# Altium PCB 175-00035 rev1, Flex Pwr Sply.PcbDoc
Units mm, origin at the board's own origin, x right, y up, seen from the top; angles counter-clockwise.
Board outline 160 x 100 mm, 5 copper layers (Top Layer (*GTL), Internal Plane 1 (*GP1), Internal Plane 2 (*GP2), Internal Plane 3 (*.GP3), Bottom Layer (*GBL)); 76 components, 28 nets, 320 pads, 50 vias.
Unrouted connection lines stored in the file: 3.
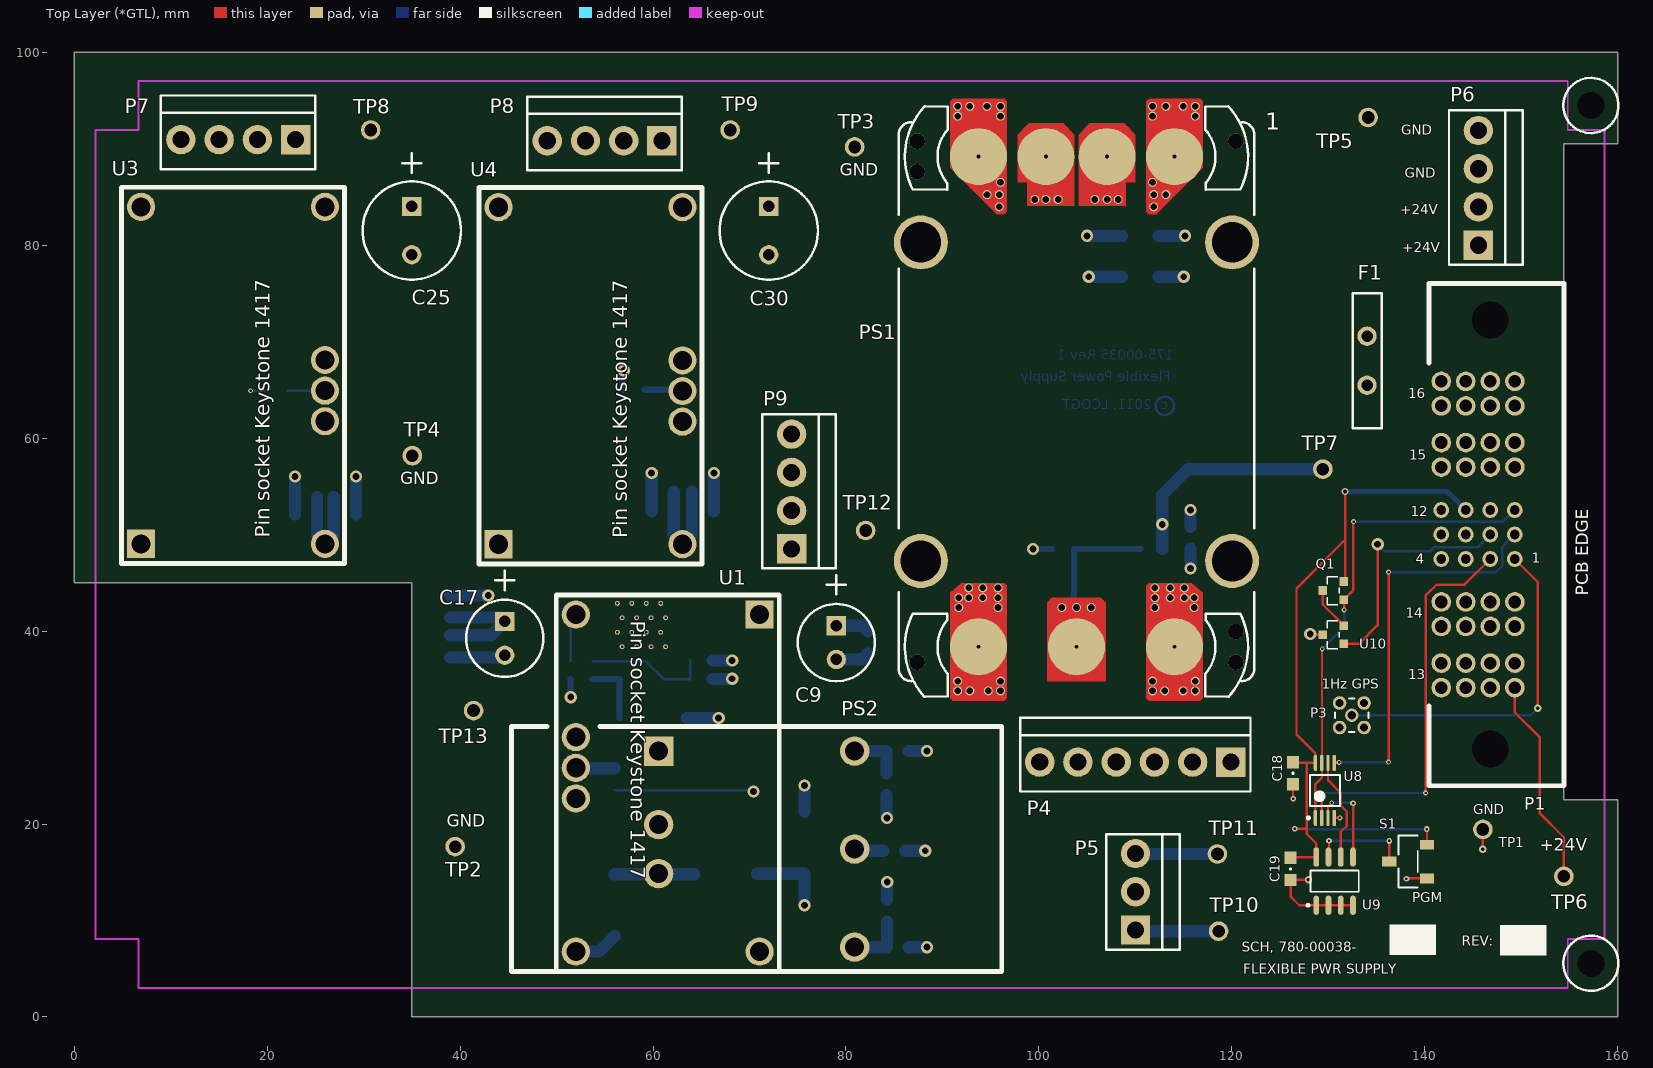
[diagram p0: Top Layer (*GTL) view]
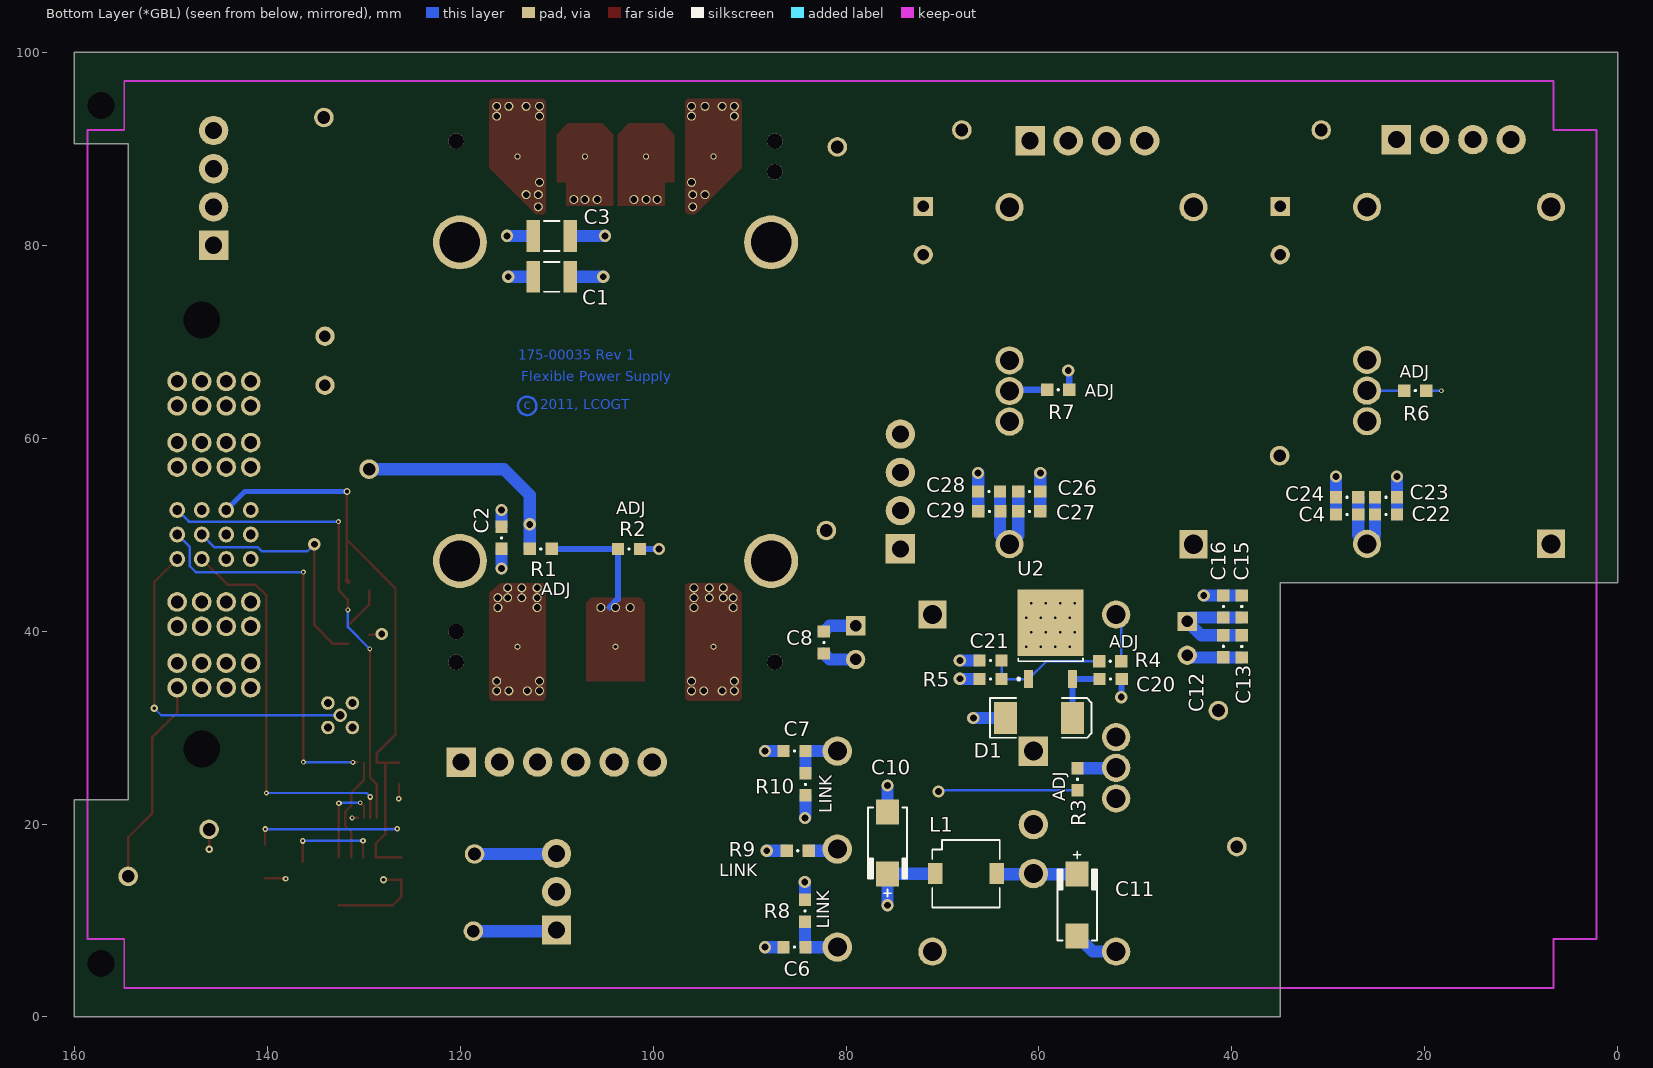
[diagram p1: Bottom Layer (*GBL) view, seen from below]
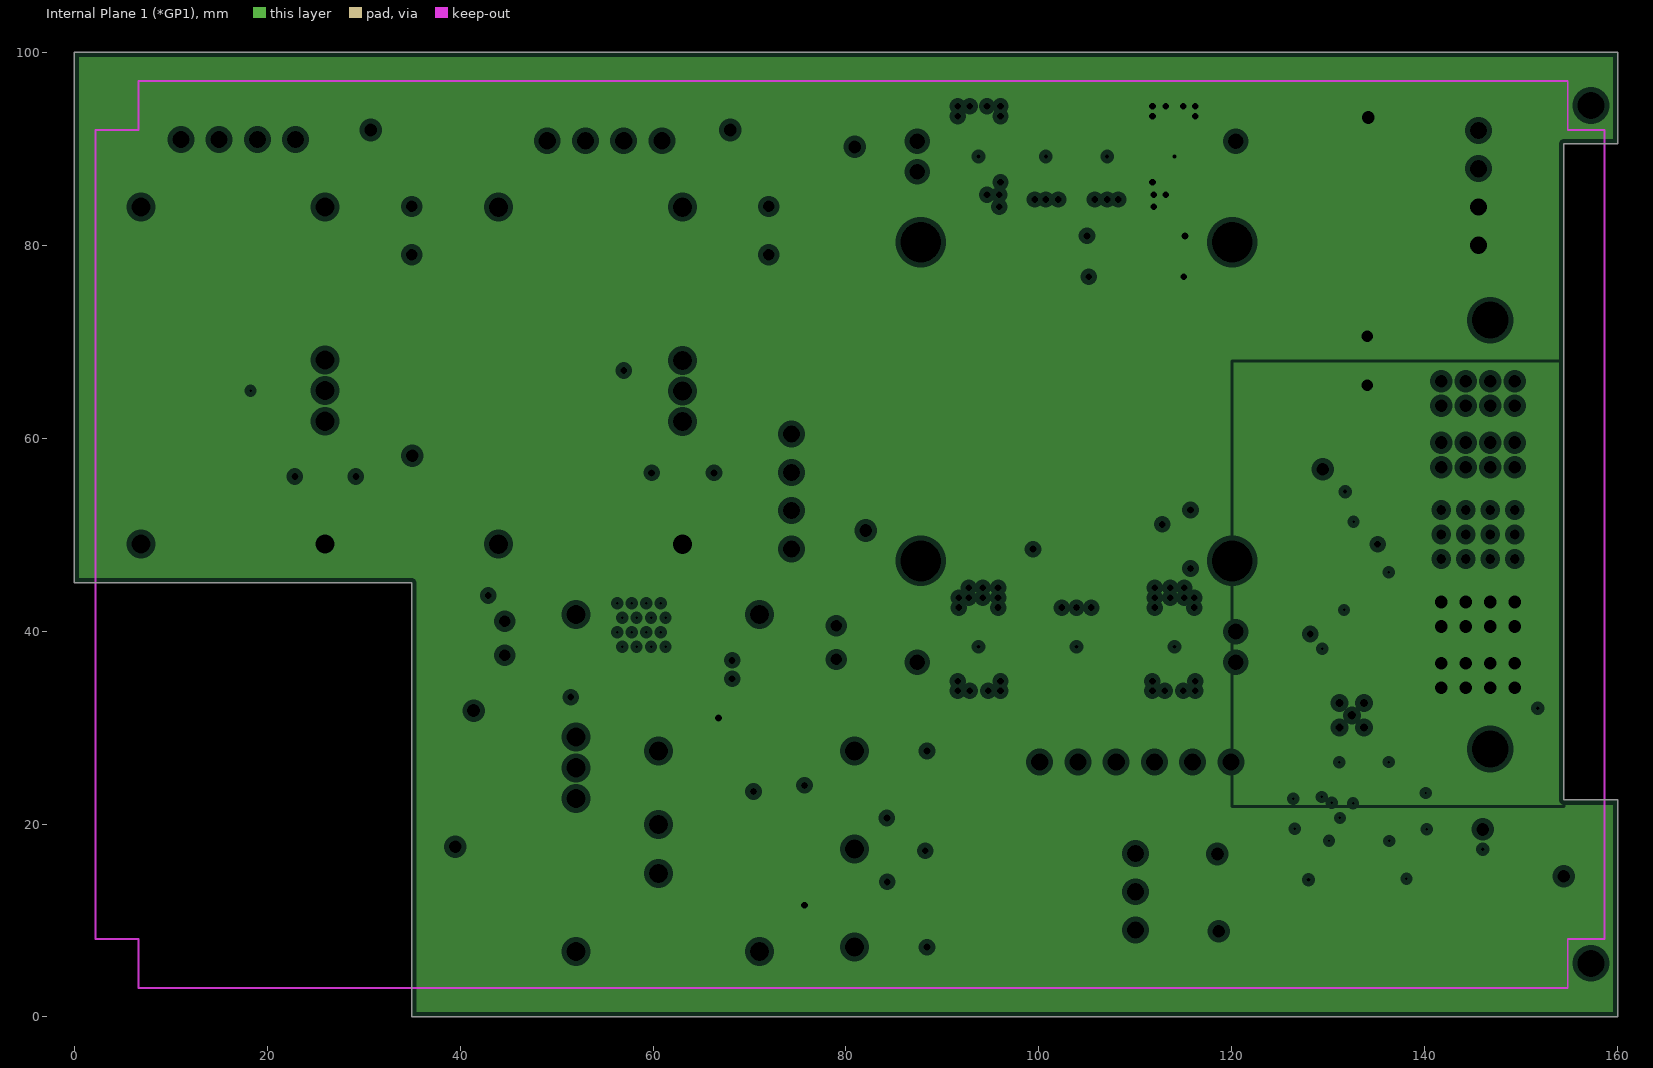
[diagram p2: Internal Plane 1 (*GP1), clearances drawn from the general rule]
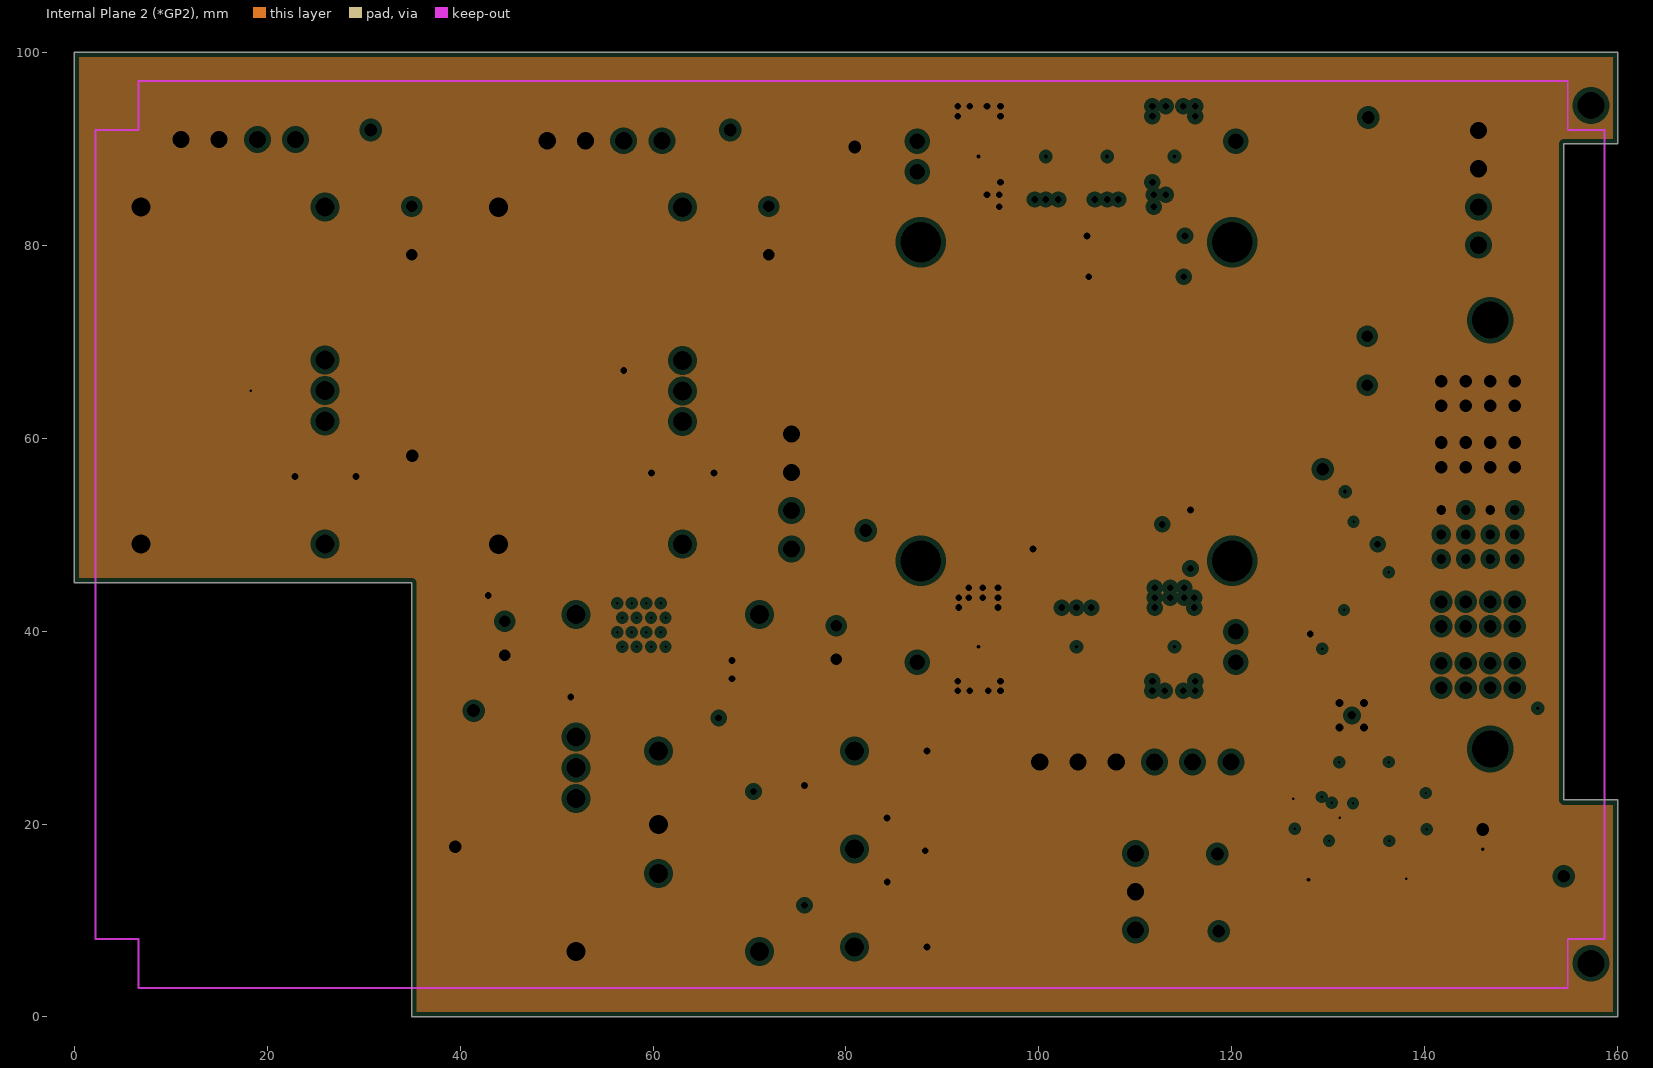
[diagram p3: Internal Plane 2 (*GP2), clearances drawn from the general rule]
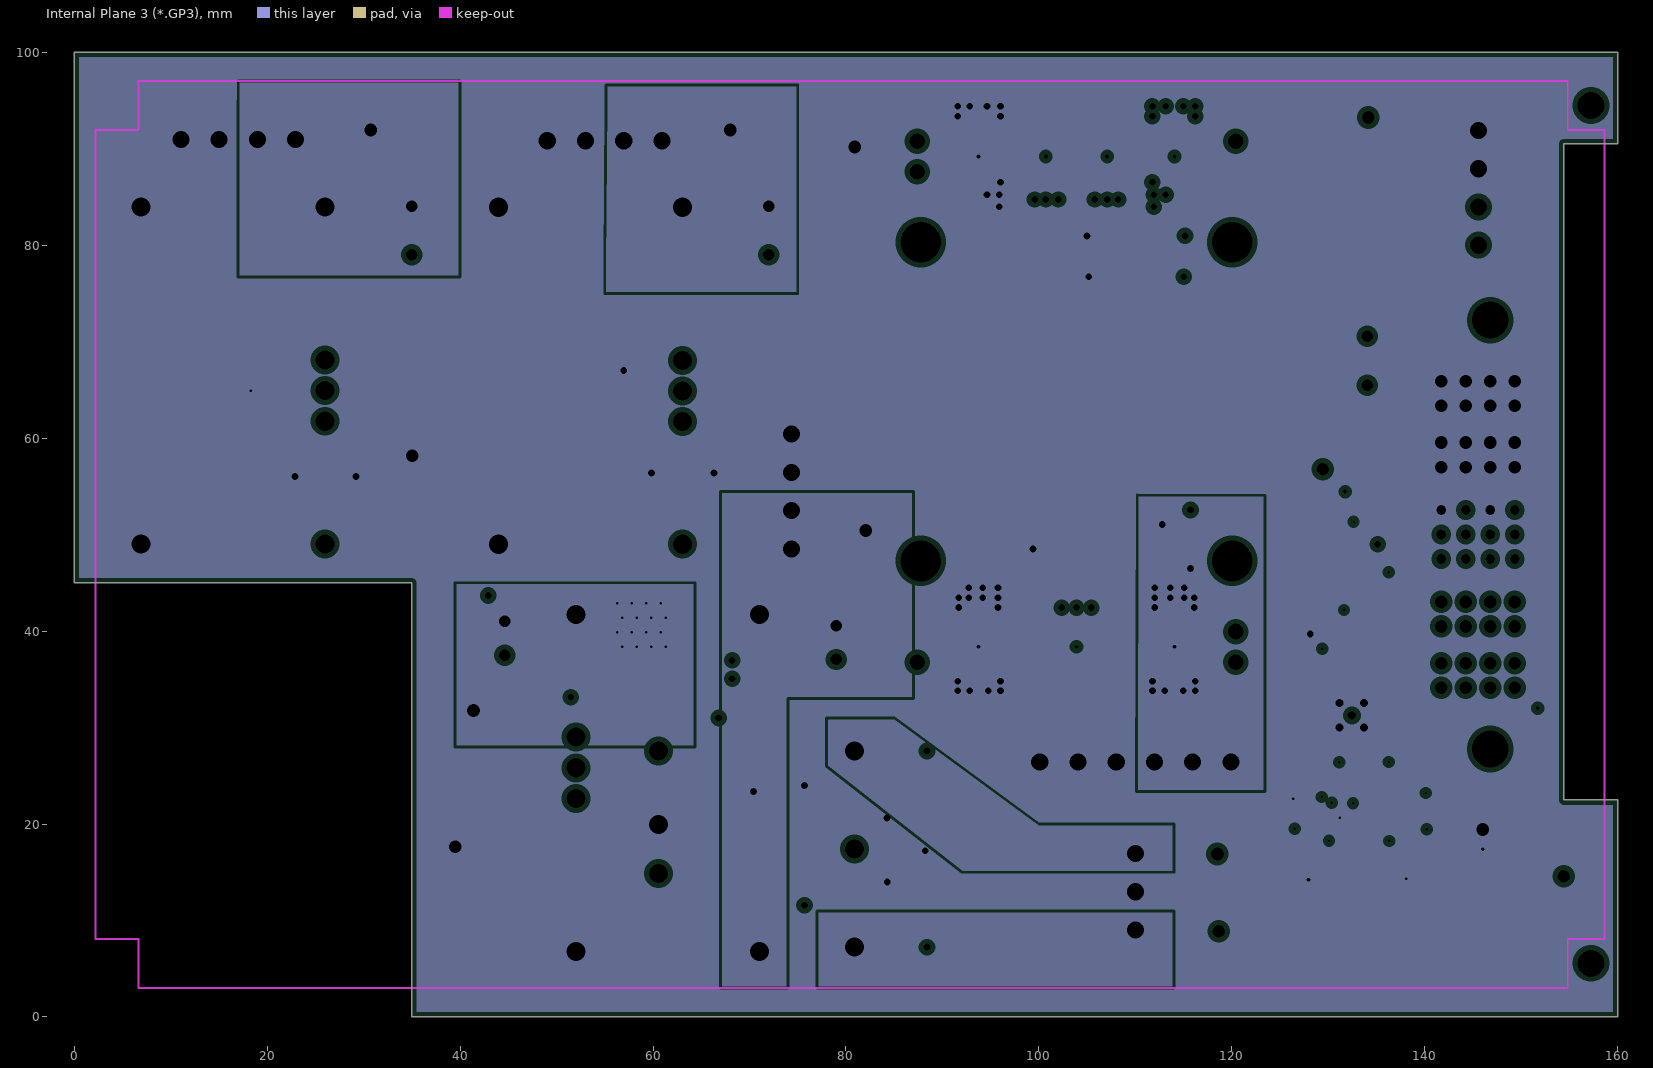
[diagram p4: Internal Plane 3 (*.GP3), clearances drawn from the general rule]

## Layer stack, top to bottom
Top Layer (*GTL): signal copper 0.0356
Dielectric: core 0.32, FR-4, Dk 4.8
Internal Plane 1 (*GP1): plane copper 0.0356, net (Multiple Nets)
Dielectric: prepreg 0.32, FR-4, Dk 4.8
Internal Plane 2 (*GP2): plane copper 0.0356, net GND
Dielectric: core 0.32, FR-4, Dk 4.8
Internal Plane 3 (*.GP3): plane copper 0.0356, net (Multiple Nets)
Dielectric: prepreg 0.32, FR-4, Dk 4.8
Bottom Layer (*GBL): signal copper 0.0356

## Board outline
35,0 35,45 0,45 0,100 160,100 160,90.5 154.4,90.5 154.4,22.5 160,22.5 160,0

## Design rules (kind name [scope] priority, off if disabled: settings)
Clearance [All] p1: gap=0.229
ComponentClearance ComponentClearance_1 [InComponent('PS2') vs InComponent('U1')] p1: gap=-100 collisioncheckmode=3 verticalgap=-100 showdistances=FALSE
ComponentClearance [All] p2: gap=0.254 collisioncheckmode=3 verticalgap=0.254 showdistances=FALSE
HoleSize [All] p1: absolutevalues=TRUE maxlimit=5.08 minlimit=0.025 maxpercent=80.000 minpercent=20.000
HoleToHoleClearance [All] p1: gap=0.127 allowstackedmicrovias=TRUE
MinimumSolderMaskSliver [All] p1: minsoldermaskwidth=0.025
PlaneClearance [All] p1: clearance=0.508
PlaneConnect PlaneConnect_1 [InComponent('PS1')] p1: planeconnectstyle=Direct reliefexpansion=0.508 reliefentries=4 reliefconductorwidth=0.254 reliefairgap=0.254
PlaneConnect [All] p2: planeconnectstyle=Relief reliefexpansion=0.508 reliefentries=4 reliefconductorwidth=0.254 reliefairgap=0.254
PolygonConnect [All] p1: connectstyle=Relief reliefconductorwidth=0.254 reliefentries=4 polygonreliefangle="90 Angle"
RoomDefinition "780-00038 rev1, Pg1, SCH, Flex Pwr Sply" [InComponentClass('780-00038 rev1, Pg1, SCH, Flex Pwr Sply')] p1: confinementstyle=ConfineIn formatcopy=TRUE lockcomponents=FALSE outline -35,-38.49 191.795,-38.49 191.795,128.295 -35,128.295
RoutingVias [All] p1: holewidth=0.711 width=1.27 viastyle="Through Hole" minholewidth=0.254 minwidth=0.508 maxholewidth=0.711 maxwidth=1.27
SilkToSilkClearance [All] p1: silktosilkclearance=0.051
SilkscreenOverComponentPads [All] p1: minsilkscreentomaskgap=0.051
SolderMaskExpansion [All] p1: expansion=0.102
Width [All] p1: maxlimit=1.27 minlimit=0.254 preferedwidth=0.635
20 further rules are at their usual default settings.

## Components (designator, comment, footprint, x,y, rotation, side; value= is the part's Value field where it differs from the comment)
C1 "Y-RATED" 1812 110.498,76.708 r0 bottom
C2 "100V" SMD_0805 115.697,49.657 r90 bottom
C3 "0.22uF" 1812 110.498,80.929 r0 bottom
C4 "35V CER" SMD_0805 28.067,52.07 r180 bottom
C6 "Cap SMD" SMD_0805 85.344,7.239 r180 bottom
C7 "Cap SMD" SMD_0805 85.344,27.559 r0 bottom
C8 "35V CER" SMD_0805 82.296,38.803 r90 bottom
C9 "35V" "CAP, Thru Hole 8mm dia" 79,38.803 r90 top
C10 "35V" SMD_CAP_7343 75.692,18.034 r270 bottom
C11 "35V" SMD_CAP_7343 56.043,11.595 r90 bottom
C12 "35V CER" SMD_0805 40.894,38.418 r90 bottom
C13 "35V CER" SMD_0805 38.989,38.407 r90 bottom
C15 "35V CER" SMD_0805 38.989,42.545 r270 bottom
C16 "35V CER" SMD_0805 40.894,42.545 r270 bottom
C17 "35V" "CAP, Thru Hole 8mm dia" 44.635,39.243 r90 top
C18 "Cap SMD" SMD_0805 126.323,25.253 r270 top
C19 "Cap SMD" SMD_0805 126.069,15.347 r270 top
C20 "Cap SMD" SMD_0805 52.578,35.02 r0 bottom
C21 "Cap SMD" SMD_0805 65.024,36.957 r180 bottom
C22 "35V CER" SMD_0805 24.029,52.07 r0 bottom
C23 "35V CER" SMD_0805 24.029,53.861 r0 bottom
C24 "35V CER" SMD_0805 28.067,53.861 r180 bottom
C25 "35V" "CAP, Thru Hole 10mm dia" 35,81.5 r90 top
C26 "35V CER" SMD_0805 61,54.458 r0 bottom
C27 "35V CER" SMD_0805 61,52.4 r0 bottom
C28 "35V CER" SMD_0805 65.179,54.458 r180 bottom
C29 "35V CER" SMD_0805 65.143,52.4 r180 bottom
C30 "35V" "CAP, Thru Hole 10mm dia" 72,81.5 r90 top
D1 "S5BC-13-F" SMC 59.984,30.988 r180 bottom
F1 "RUEF400" "PolySwitch Radial 0.2" 134,68.015 r90 top
L1 "445-3869-1-ND" "Inductor TDC SLF" 67.564,14.859 r90 bottom
P1 "PETC-02-12-02--01-S-RA-SD" PETC-02-12-02-01-RA 145.5,50 r0 top locked
P3 "COAX MMCX" MMCX2.54-V5 132.42,31.27 r90 top
P4 "Header 6 0.156\"" "HDR 1X6 0.156\"" 119.887,26.416 r180 top
P5 "Header 3" "HDR 1X3 0.156\"" 110,9.015 r90 top
P6 "Header 4 0.156\"" "HDR 1X4 0.156\"" 145.542,79.985 r90 top
P7 "Header 4 0.156\"" "HDR 1X4 0.156\"" 22.962,90.924 r180 top
P8 "Header 4 0.156\"" "HDR 1X4 0.156\"" 60.925,90.807 r180 top
P9 "Header 4 0.156\"" "HDR 1X4 0.156\"" 74.364,48.514 r90 top
PS1 "Vicor Micro" "VICOR MICRO SURFMATE" 120.396,36.768 r0 top locked
PS2 "BetaDyne LMB15" "BetaDyne LNB15, DC/DC" 96.139,30.099 r180 top
Q1 "FDV304P" SMD_SOT23_3 130.5,44.185 r90 top
R1 "Res 0805" SMD_0805 111.633,48.514 r0 bottom
R2 "Res 0805" SMD_0805 102.489,48.489 r180 bottom
R3 "Res 0805" SMD_0805 56.007,24.638 r270 bottom
R4 "Res 0805" SMD_0805 52.614,36.87 r180 bottom
R5 "Res 0805" SMD_0805 65.024,35.02 r180 bottom
R6 "Res 0805" SMD_0805 21,64.912 r0 bottom
R7 "Res 0805" SMD_0805 58,65 r0 bottom
R8 "Res 0805" SMD_0805 84.237,11 r90 bottom
R9 "Res 0805" SMD_0805 85,17.23 r0 bottom
R10 "Res 0805" SMD_0805 84.201,24.11 r90 bottom
S1 "CJS-1200TB" CAS-120B 138.261,16.109 r90 top
TP1 "Test point" PAD_80D_052H 146,19.443 r180 top
TP2 "Test point" PAD_80D_052H 39.497,17.653 r90 top
TP3 "Test point" PAD_80D_052H 80.899,90.17 r90 top
TP4 "Test point" PAD_80D_052H 35.052,58.166 r90 top
TP5 "Test point" PAD_80D_052H 134.112,93.218 r90 top
TP6 "Test point" PAD_80D_052H 154.39,14.58 r90 top
TP7 "Test point" PAD_80D_052H 129.413,56.769 r90 top
TP8 "Test point" PAD_80D_052H 30.746,91.923 r90 top
TP9 "Test point" PAD_80D_052H 68,91.923 r90 top
TP10 "Test point" PAD_80D_052H 118.618,8.89 r90 top
TP11 "Test point" PAD_80D_052H 118.491,16.891 r90 top
TP12 "Test point" PAD_80D_052H 82.042,50.419 r90 top
TP13 "Test point" PAD_80D_052H 41.402,31.75 r90 top
U1 "4A Neg Adj Switching Regulator" "TEXAS INST SWITCHING REGULATOR" 52,41.7 r270 top
U2 "Voltage Reg, Adj" "TO-252(D-PAK)  POWERPAD" 58.801,39.37 r90 bottom
U3 "6A Pos Switching Regulator" "TEXAS INST SWITCHING REGULATOR" 26,49.037 r90 top
U4 "6A Pos Switching Regulator" "TEXAS INST SWITCHING REGULATOR" 63.05,48.997 r90 top
U8 "SN74CBT3306PWLE" PW008_N 129.625,23.475 r90 top
U9 "M24C32RMN1" SOP8_N 130.641,14.077 r90 top
U10 "DS2411" SMD_SOT23_3 130.5,39.613 r90 top
? "Comment" "TARGET MECHANICAL 5" -32.182,-38 r0 top
? "Comment" "TARGET MECHANICAL 5" -34,109 r0 top
? "Comment" "TARGET MECHANICAL 5" 177,112 r0 top

## Footprints (in the part's own frame and the unit in brackets; to place one, negate y for a bottom-side part, rotate by r counter-clockwise, add the part's x,y. Pads: shape width x height; smd on the part's side, far side on the other; paste and mask are expansions set on the pad)
1812 [mm] "Chip Capacitor, Body 4.5x3.2mm, IPC High Density"
  rect 1.4x3.3 smd: 1(-1.9,0) 2(1.9,0)
  silkscreen extent -0.8,-1.55 0.8,1.55, body extent -2.4,-1.7 2.4,1.7, height 1.4
"BetaDyne LNB15, DC/DC" [mil] "15W Low Noise"
  rect 120x120 hole 78: 1(1400,100)
  round 120 hole 78: 2(1400,400) 3(1400,600) 4(600,900) 5(600,500) 6(600,100)
  silkscreen extent 0,0 2000,1000
"CAP, Thru Hole 8mm dia" [mm]
  rect 2x2 hole 1.2: 1(1.75,0)
  round 2 hole 1.2: 2(-1.75,0)
  silkscreen extent -4,-4 7,4
"CAP, Thru Hole 10mm dia" [mm]
  rect 2x2 hole 1.2: 1(2.5,0)
  round 2 hole 1.2: 2(-2.5,0)
  silkscreen extent -5.1,-5.1 8,5.1
CAS-120B [mm] "Copal Electronics CAS SMD Slide Switch"
  rect 1x1.5 smd: 1(-1.75,-1.95) 2(0,1.95) 3(1.75,-1.95)
  silkscreen extent -2.69,-1 2.69,1
"HDR 1X3 0.156\"" [mil] "Connector; Header; 3 Position"
  rect 120x120 hole 70: 1(0,0)
  round 120 hole 70: 2(156,0) 3(312,0)
  silkscreen extent -80,-180 390,120
"HDR 1X4 0.156\"" [mil] "Connector; Header; 4 Position"
  rect 120x120 hole 70: 1(0,0)
  round 120 hole 70: 2(156,0) 3(312,0) 4(468,0)
  silkscreen extent -80,-180 550,120
"HDR 1X6 0.156\"" [mil] "Connector; Header; 6 Position"
  rect 120x120 hole 70: 1(0,0)
  round 120 hole 70: 2(156,0) 3(312,0) 4(468,0) 5(624,0) 6(780,0)
  silkscreen extent -80,-180 860,120
"Inductor TDC SLF" [mm] "SLF series"
  rect 2.2x1.5 smd: 1(0,3.2) 2(0,-3.2)
  silkscreen extent -3.5,-3.5 3.5,3.5
MMCX2.54-V5 [mm] "Connector; RF Coaxial, MMCX, Thru-Hole; 5 Position; Vertical"
  round 1.4 hole 0.85: 1(0,0) 2(-1.27,-1.27) 3(1.27,-1.27) 4(1.27,1.27) 5(-1.27,1.27)
  silkscreen extent -1.75,-1.75 1.75,1.75
PAD_80D_052H [mil]
  round 80 hole 52: 1(0,0)
PETC-02-12-02-01-RA [mil] "Samtec Male Pins, PWR(4), Signal(12), Right Angle"
  round 59.06 hole 150 unplated: 0(50,-875) 0(50,875)
  round 65 hole 40: 1(150,-100) 2(50,-100) 3(-50,-100) 4(-150,-100) 5(150,0) 6(50,0) 7(-50,0) 8(-150,0) 9(150,100) 10(50,100) 11(-50,100) 12(-150,100)
  round 80 hole 52: 13(-150,-625) 13(-150,-525) 13(-50,-625) 13(-50,-525) 13(50,-625) 13(50,-525) 13(150,-625) 13(150,-525) 14(-150,-375) 14(-150,-275) 14(-50,-375) 14(-50,-275) 14(50,-375) 14(50,-275) 14(150,-375) 14(150,-275) 15(-150,275) 15(-150,375) 15(-50,275) 15(-50,375) 15(50,275) 15(50,375) 15(150,275) 15(150,375) 16(-150,525) 16(-150,625) 16(-50,525) 16(-50,625) 16(50,525) 16(50,625) 16(150,525) 16(150,625)
  silkscreen extent -200,-1025 350,1025
"PolySwitch Radial 0.2" [mm] "PolySwitch footprint"
  round 2 hole 1.2: 1(-2.54,0) 2(2.54,0)
  silkscreen extent -7,-1.5 7,1.5
PW008_N [mm] "SOP, 8-Leads, Body 3x4.4mm, Pitch 0.65mm, IPC Medium Density"
  oval 1.7x0.35 smd: 1(-2.85,0.975) 2(-2.85,0.325) 3(-2.85,-0.325) 4(-2.85,-0.975) 5(2.85,-0.975) 6(2.85,-0.325) 7(2.85,0.325) 8(2.85,0.975)
  silkscreen extent -2.97,-1.55 1.6,1.82, body extent -2.25,-1.55 2.25,1.55, height 3.1
SMC [mm] "DO-214-AB/SMC; 2 C-Bend Leads; Body 7.9 x 5.9 mm, inc. leads (LxW)"
  rect 2.4x3.3 smd: 1(-3.475,0) 2(3.475,0)
  silkscreen extent -5.07,-2.05 5.43,2.05
SMD_0805 [mil]
  rect 50x50 smd: 1(-45,0) 2(45,0)
  silkscreen extent -1,-1 1,1
SMD_CAP_7343 [mil]
  rect 102x94 smd: NEG(-126,0) POS(126,0)
  silkscreen extent -145,-80 220,80
SMD_SOT23_3 [mil]
  rect 36x36 smd: 1(-37,-43) 2(37,-43) 3(0,43)
  silkscreen extent -57,-25 57,25
SOP8_N [mm] "SOIC, 8-Leads, Body 4.9x3.9mm, Pitch 1.27mm, IPC Medium Density"
  oval 2x0.6 smd: 1(-2.5,1.905) 2(-2.5,0.635) 3(-2.5,-0.635) 4(-2.5,-1.905) 5(2.5,-1.905) 6(2.5,-0.635) 7(2.5,0.635) 8(2.5,1.905)
  silkscreen extent -2.62,-2.5 1.1,2.88, body extent -2,-2.5 2,2.5, height 1.75
"TARGET MECHANICAL 5" [mm]
"TEXAS INST SWITCHING REGULATOR" [mil] "Texas Instruments Integrated switching regulator"
  rect 115x115 hole 78: 1(0,750)
  round 115 hole 78: 2(0,0) 3(500,0) 4(625,0) 5(750,0) 6(1375,0) 7(1375,750)
  silkscreen extent -80,-80 1455,830
"TO-252(D-PAK)  POWERPAD" [mil] "D-PAK, 3-Pads, Body 6.2x6.7mm (max), IPC Medium Density"
  rect 74.8x37.4 smd: 1(-171.26,89.76) 3(-171.26,-89.76)
  round 20 hole 10: 2(-39.37,-78.74) 2(-39.37,-19.68) 2(-39.37,39.37) 2(-39.37,98.43) 2(19.68,-98.43) 2(19.68,-39.37) 2(19.68,19.69) 2(19.68,78.74) 2(78.74,-78.74) 2(78.74,-19.68) 2(78.74,39.37) 2(78.74,98.43) 2(137.8,-98.43) 2(137.8,-39.37) 2(137.8,19.69) 2(137.8,78.74)
  rect 271.65x267.72 smd: 2(59.06,0)
  silkscreen extent -176,-132 -88,135, body extent -98,-132 146,132, height 94
"VICOR MICRO SURFMATE" [mil] "Vicor Microbrick with SurfMate sockets"
  round 64 hole 64 unplated: 0(-1300,0) 0(-1300,2001) 0(-1300,2126) 0(0,0) 0(0,125) 0(0,2126)
  round 220.47 hole 166.14: 0(-1285,413) 0(-1285,1713) 0(-15,413) 0(-15,1713)
  round 37 hole 27 mask+0: 1(-340,1958) 1(-340,2228) 1(-340,2268) 1(-335,1858) 1(-335,1908) 1(-285,1908) 1(-285,2268) 1(-215,2268) 2(-575,1888) 2(-525,1888) 2(-480,1888) 3(-820,1888) 3(-775,1888) 3(-725,1888) 4(-1085,2268) 4(-1015,1908) 4(-1015,2268) 4(-965,1858) 4(-965,1908) 4(-960,1958) 4(-960,2228) 4(-960,2268) 5(-1135,-117) 5(-1135,-77) 5(-1130,223) 5(-1130,263) 5(-1090,263) 5(-1090,303) 5(-1085,-117) 5(-1032.5,263) 5(-1032.5,303) 5(-1010,-117) 5(-970,223) 5(-970,263) 5(-970,303) 5(-960,-117) 5(-960,-77) 6(-710,223) 6(-650,223) 6(-590,223) 7(-340,-117) 7(-340,-77) 7(-330,223) 7(-330,263) 7(-330,303) 7(-290,-117) 7(-267.5,263) 7(-267.5,303) 7(-215,-117) 7(-210,263) 7(-210,303) 7(-170,223) 7(-170,263) 7(-165,-117) 7(-165,-77)
  round 233 / inner round 25 / far side round 25 hole 16 unplated: 1(-250,2063) 2(-525,2063) 3(-775,2063) 4(-1050,2063) 5(-1050,63) 6(-650,63) 7(-250,63)
  round 37 hole 27 paste+0 mask+0: 1(-165,2228) 1(-165,2268) 4(-1135,2228) 4(-1135,2268)
  Top Layer (*GTL) region: -145,-157 -135,-147 -135,283 -180,323 -355,323 -365,313 -365,-147 -355,-157
  Top Layer (*GTL) region: -770,-77 -770,243 -750,263 -550,263 -530,243 -530,-77
  Top Layer (*GTL) region: -1155,-157 -1165,-147 -1165,283 -1120,323 -945,323 -935,313 -935,-147 -945,-157
  Top Layer (*GTL) region: -325,1828 -135,2018 -135,2288 -145,2298 -355,2298 -365,2288 -365,1838 -355,1828
  Top Layer (*GTL) region: -640,1863 -640,2153 -595,2198 -455,2198 -410,2153 -410,1958 -450,1958 -450,1863
  Top Layer (*GTL) region: -660,1863 -660,2153 -705,2198 -845,2198 -890,2153 -890,1958 -850,1958 -850,1863
  Top Layer (*GTL) region: -975,1828 -1165,2018 -1165,2288 -1155,2298 -945,2298 -935,2288 -935,1838 -945,1828
  silkscreen extent -1375,-142 75,2268

## Part data
C1 C3: library part "CAP NP_DOUG"
C2 C4 C8 C12 C13 C15 C16 C22 C23 C24 C26 C27 C28 C29: library part "Cap SMD", "Capacitor"
C6 C7 C18 C19 C20 C21: "Capacitor"
C9 C17: library part "Cap Elec, 100 uF, 35V", "Radial Thru hole"
C10 C11: library part "Cap Tant 35V", "outline 6.0mm x 3.2mm"
C25 C30: library part "Cap Elec, 330 uF, 35V", "Radial Thru hole"
D1: library part Diode, "Default Diode"
F1: library part "Fuse Thermal", "PolySwitch RUE Series"
L1: library part "Inductor SMD 10uH 1.8A", "Inductor"
P1: "SAMTEC, SIGNAL(12)+PWR(4)"
P3: library part COAX-M, "RF Coaxial PCB Connector, MMCX; Thru-Hole, Vertical Mount Plug,  50 Ohm Impedance"
P4: "Header, 6-Pin"
P5: library part "Header 3, 0.156", "Header, 3-Pin, 0.156"
P6 P7 P8 P9: "Header, 4-Pin"
PS2: "DC/DC LMB15 15W, Dual Output"
Q1: "P-MOSFET LOGIC LEVEL"
R1 R2 R3 R4 R5 R6 R7 R8 R9 R10: library part "Res SMD", "Resistor 0805"
S1: library part SW_SPDT_DOUG
TP1 TP2 TP3 TP4 TP5 TP6 TP7 TP8 TP9 TP10 TP11 TP12 TP13: "Test Point"
U1: library part PTN78020A, "Neg Adj Switching Regulator"
U2: library part "Voltage Reg, Adjustable", "IFX27001"
U3 U4: library part PTN78020W, "Pos Adj Switching Regulator"
U8: "Dual FET Bus Switch"
U9: "32 Kbit Serial I²C Bus EEPROM"
U10: "Silicon Serial Number"

## Free pads (board coordinates)
  round 1.27 hole 2.794 unplated: 2(157.195,5.563) 2(157.195,94.463)

## Via types
v1: diameter 1.27, hole 0.711, Top Layer (*GTL) to Bottom Layer (*GBL), 28 vias
v2: diameter 0.508, hole 0.254, Top Layer (*GTL) to Bottom Layer (*GBL), 10 vias
v3: diameter 0.61, hole 0.254, Top Layer (*GTL) to Bottom Layer (*GBL), 8 vias
v4: diameter 0.762, hole 0.381, Top Layer (*GTL) to Bottom Layer (*GBL), 4 vias

## Nets (pads, with @x,y where several pads share a name; then routed paths per layer and width w, separated by ;. In a path a pad name is that pad's centre, name@x,y a point inside that pad or via, vN(x,y) a via of type N, cw(c..) or ccw(c..) an arc to the next point about the centre after c; other vN are vias at no path point)
12V/48V: C2.1 P4.1 P4.2 P4.3 PS1.7 R1.2 TP7.1 | length 25.4
  Bottom Layer (*GBL) w1.27: R1.2 v1(112.776,51.054) 112.776,54.095 115.45,56.769 TP7.1 ; v1(115.697,46.482) C2.1
+3.3V_BKPL: C18.1 C19.1 P1.11 Q1.2 S1.3 U8.8 U9.8 | length 80.4
  Top Layer (*GTL) w0.254: C19.1 126.156,16.577 U9.8 128.736,17.964 127.745,18.954 127.745,19.513 ; C18.1 126.394,26.325 127.745,26.325 ; v3(126.501,19.513) 127.745,19.513 ; Q1.2@131.717,45.249 131.717,49.301 ; v4(131.717,54.458) 131.717,49.301 ; v3(140.191,19.462) 140.211,19.443 S1.3 ; 127.745,19.513 127.745,26.325 ; 127.745,26.325 U8.8 128.65,27.324 126.688,29.286 126.688,44.425 131.564,49.301 131.717,49.301
  Top Layer (*GTL) w0.508: Q1.2 Q1.2@131.717,45.249
  Bottom Layer (*GBL) w0.254: v3(126.501,19.513) 126.552,19.462 v3(140.191,19.462)
  Bottom Layer (*GBL) w0.508: v4(131.717,54.458) 142.312,54.458 P1.11
+5V: C30.1 P8.1 P8.2 TP9.1 U4.6
+7.5/+9V: C25.1 P7.1 P7.2 TP8.1 U3.6
+15V: C6.2 P5.1 PS2.4 R8.1 TP10.1 | length 14.6
  Bottom Layer (*GBL) w1.27: PS2.4 C6.2 84.237,7.275 R8.1 ; P5.1 110.125,8.89 TP10.1
+20V: C12.2 C13.2 C15.2 C16.2 C17.1 R4.2 TP13.1 U1.2 U2.2 | length 17.1
  Bottom Layer (*GBL) w0.254: R4.2 51.471,41.171 U1.2
  Bottom Layer (*GBL) w1.27: C13.2 43.192,39.55 C17.1 44.226,41.402 C16.2 C15.2
+24V: F1.1 P1.13 P1.14 TP6.1 | length 21.6
  Top Layer (*GTL) w0.254: P1.13@149.31,34.125 149.31,31.556 151.91,28.956 151.91,21.107 154.39,18.627 TP6.1
+24V_FUSED: C1.2 C3.2 C4.2 C10.POS C22.2 C23.2 C24.2 C26.2 C27.2 C28.2 C29.2 D1.1 F1.2 L1.1 P6.1 P6.2 PS1.1 TP5.1 U3.2 U4.2 | length 38.9
  Bottom Layer (*GBL) w1.27: C23.2 C22.2 25.172,49.865 U3.2 26.924,49.961 C4.2 C24.2 ; C26.2 C27.2 62.143,49.904 U4.2 64.036,49.983 C28.2 ; D1.1 v1(66.802,30.988) ; L1.1@70.789,14.834 C10.POS v1(75.692,11.577) ; C1.2 v1(115.006,76.708) ; C3.2 115.108,80.929 v1(115.133,80.954)
-9V: C8.2 C9.1 P9.1 P9.2 R3.2 TP12.1 U1.1 U1.7 | length 18
  Bottom Layer (*GBL) w0.254: R3.2 70.288,23.495 v1(70.415,23.368)
  Bottom Layer (*GBL) w1.27: C9.1 81.689,40.553 C8.2
-15V: C7.1 P5.3 PS2.6 R10.2 TP11.1 | length 14.1
  Bottom Layer (*GBL) w1.27: PS2.6 C7.1 R10.2 ; P5.3 110.049,16.891 TP11.1
GND: C1.1 C2.2 C3.1 C4.1 C6.1 C7.2 C8.1 C9.2 C10.NEG C11.NEG C12.1 C13.1 C15.1 C16.1 C17.2 C18.2 C19.2 C20.1 C21.1 C22.1 C23.1 C24.1 C25.2 C26.1 C27.1 C28.1 C29.1 C30.2 P1.10 P1.12 P1.15 P1.16 P3.2 P3.3 P3.4 P3.5 P4.4 P4.5 P4.6 P5.2 P6.3 P6.4 P7.3 P7.4 P8.3 P8.4 P9.3 P9.4 PS1.4 PS1.5 PS2.2 R2.2 R5.1 R6.1 R7.1 R8.2 R9.2 R10.1 S1.1 TP1.1 TP2.1 TP3.1 TP4.1 U1.6 U3.1 U3.7 U4.1 U4.7 U8.4 U9.1 U9.2 U9.3 U9.4 U10.3 | length 85.1
  Top Layer (*GTL) w0.254: C18.2 126.323,22.637 v3(126.348,22.612) ; v4(127.932,14.224) 127.913,14.204 C19.2 126.069,12.477 126.969,11.577 U9.1 U9.2 U9.3 U9.4 ; v1(128.112,39.689) 128.189,39.613 U10.3 ; U8.4 v2(131.183,20.625) ; v3(138.083,14.331) 138.111,14.359 S1.1 ; v4(146,17.383) TP1.1
  Bottom Layer (*GBL) w0.254: v2(18.288,64.897) 18.303,64.912 R6.1 ; v1@66.286,56.352 v1(66.322,56.388)
  Bottom Layer (*GBL) w0.635: C20.1 51.435,33.183 v1(51.471,33.147) ; R7.1 56.857,66.895 v1(56.962,67) ; v1(99.378,48.489) R2.2
  Bottom Layer (*GBL) w1.27: C22.1 C23.1 v1(22.886,56.007) ; C4.1 C24.1 v1(29.21,56.007) ; C13.1 44.406,37.264 C17.2 ; C15.1 C16.1 v1(42.926,43.688) ; U1.6 54.423,6.775 C11.NEG ; C27.1 C26.1 v1(59.857,56.388) ; R5.1 68.167,35.02 v1(68.199,35.052) ; C21.1 v1(68.199,36.957) ; C29.1 v1@66.286,56.352 ; C10.NEG v1(75.692,24) ; C9.2 81.689,37.053 C8.1 ; R10.1 84.201,20.661 v1(84.237,20.625) ; R8.2 84.237,13.964 v1(84.273,14) ; R9.2 v1(88.207,17.23) ; C6.1 v1(88.392,7.239) ; C7.2 v1(88.392,27.559) ; v1(104.973,80.954) 104.973,80.929 C3.1 ; v1(105.164,76.708) C1.1 ; C2.2 v1(115.697,52.54)
GPS_DATA: P1.1 P3.1 | length 36
  Top Layer (*GTL) w0.254: P1.1 151.69,45.08 v4(151.69,32)
  Bottom Layer (*GBL) w0.254: P3.1 150.96,31.27 v4(151.69,32)
I2C_SCL: U8.6 U9.6 | length 10.8
  Top Layer (*GTL) w0.254: U8.6 129.95,24.547 131.276,23.221 131.276,21.904 131.895,21.285 131.895,19.812 131.276,19.193 U9.6
I2C_SDA: U8.3 U9.5 | length 9.5
  Top Layer (*GTL) w0.254: U8.3 129.95,21.804 v2(130.345,22.2) ; U9.5 v3(132.546,22.155)
  Bottom Layer (*GBL) w0.254: v2(130.345,22.2) 132.501,22.2 v3(132.546,22.155)
NetC11_pos: C11.POS L1.2 PS2.3 | length 8.3
  Bottom Layer (*GBL) w1.27: C11.POS L1.2@64.3,14.795
NetC20_2: C20.2 D1.2 U2.3 | length 6.8
  Bottom Layer (*GBL) w0.635: C20.2 U2.3 56.521,31 D1.2
NetC21_2: C21.2 R4.1 R5.2 U2.1 | length 12.8
  Bottom Layer (*GBL) w0.254: R4.1 59.231,36.87 U2.1 R5.2 C21.2
NetP1_2: P1.2 U8.2 | length 41.8
  Top Layer (*GTL) w0.254: U8.2 v3(129.3,22.81) ; v2(140.076,23.213) 140.076,43.663 141.219,44.806 144.116,44.806 P1.2
  Bottom Layer (*GBL) w0.254: v3(129.3,22.81) 129.703,23.213 v2(140.076,23.213)
NetP1_5: P1.5 U8.5 | length 41.2
  Top Layer (*GTL) w0.254: U8.5@130.665,26.391 v2(131.107,26.391) v2@131.042,26.325 ; v2(136.238,26.416) v2(136.238,46.101)
  Bottom Layer (*GBL) w0.254: v2(131.107,26.391) 131.133,26.416 v2(136.238,26.416) ; v2(136.238,46.101) 147.389,46.101 147.998,46.711 147.998,48.688 P1.5
NetPS1_6: PS1.6 R1.1 R2.1 | length 13.3
  Bottom Layer (*GBL) w0.635: 104.521,42.432 103.632,43.321 R2.1 103.657,48.514 R1.1
NetPS2_5: PS2.5 R9.1 | length 3
  Bottom Layer (*GBL) w1.27: PS2.5 81.068,17.23 R9.1
NetQ1_3: Q1.3 U10.2 | length 4.5
  Top Layer (*GTL) w0.254: Q1.3 129.408,42.737 U10.2
NetR3_1: R3.1 U1.4 | length 4
  Bottom Layer (*GBL) w1.27: U1.4 52.044,25.781 R3.1
NetR6_2: R6.2 U3.4 | length 3.9
  Bottom Layer (*GBL) w0.254: R6.2 U3.4
NetR7_2: R7.2 U4.4 | length 3.8
  Bottom Layer (*GBL) w0.635: R7.2 U4.4@62.922,65
NetS1_2: S1.2 U9.7 | length 10.1
  Top Layer (*GTL) w0.254: U9.7 130.057,16.628 v3(130.057,18.268) ; v3(136.305,18.243) 136.311,18.237 S1.2
  Bottom Layer (*GBL) w0.254: v3(130.057,18.268) 130.082,18.243 v3(136.305,18.243)
SILICON_SN: P1.6 U10.1 | length 25.4
  Top Layer (*GTL) w0.254: U10.1 133.151,38.673 135.095,40.617 v1(135.095,48.997)
  Bottom Layer (*GBL) w0.254: v1(135.095,48.997) 135.832,48.26 140.531,48.26 140.937,48.666 145.436,48.666 P1.6
~CS_SLOT: P1.9 Q1.1 U8.1 U8.7 | length 49.6
  Top Layer (*GTL) w0.254: U8.1 128.64,20.636 128.64,24.126 129.329,24.816 129.329,38.125 v2(129.355,38.151) ; v2(131.615,42.189) 131.615,43.222 Q1.1 132.58,44.233 132.58,51.308 v2(132.606,51.333)
  Bottom Layer (*GBL) w0.254: v2(129.355,38.151) 131.615,40.411 v2(131.615,42.189) ; v2(132.606,51.333) 148.103,51.333 P1.9
pads on no net: P1.0 P1.3 P1.4 P1.7 P1.8 PS1.0 PS1.2 PS1.3 PS2.1 U1.3 U1.5 U3.3 U3.5 U4.3 U4.5
copper on no net: | length 6
  Bottom Layer (*GBL) w0.254: 114,63.335 ccw(c113.044,63.335) 114,63.335

## Polygon pours and split planes (outlines as drawn)
+24V on Internal Plane 1 (*GP1) (split plane): 153.89,22.5 153.899,22.4 153.928,22.305 153.976,22.216 154.039,22.139 154.116,22.076 154.205,22.028 154.246,22.016 154.246,21.958 120.154,21.958 120.154,67.846 153.89,67.846
+24V_FUSED on Internal Plane 1 (*GP1) (split plane): 159.49,91.01 154.4,91.01 154.3,91.001 154.205,90.972 154.116,90.924 154.039,90.861 153.976,90.784 153.928,90.695 153.899,90.6 153.89,90.5 153.89,68.154 120,68.154 119.96,68.148 119.923,68.133 119.891,68.109 119.867,68.077 119.852,68.04 119.846,68 119.846,21.804 119.852,21.765 119.867,21.728 119.891,21.696 119.923,21.671 119.96,21.656 120,21.651 154.4,21.651 154.44,21.656 154.477,21.671 154.509,21.696 154.533,21.728 154.548,21.765 154.554,21.804 154.554,21.99 159.49,21.99 159.49,0.51 35.51,0.51 35.51,45 35.501,45.1 35.472,45.195 35.424,45.284 35.361,45.361 35.284,45.424 35.195,45.472 35.1,45.501 35,45.51 0.51,45.51 0.51,99.49 159.49,99.49
GND on Internal Plane 2 (*GP2) (split plane): 159.49,91.01 154.4,91.01 154.3,91.001 154.205,90.972 154.116,90.924 154.039,90.861 153.976,90.784 153.928,90.695 153.899,90.6 153.89,90.5 153.89,22.5 153.899,22.4 153.928,22.305 153.976,22.216 154.039,22.139 154.116,22.076 154.205,22.028 154.3,21.999 154.4,21.99 159.49,21.99 159.49,0.51 35.51,0.51 35.51,45 35.501,45.1 35.472,45.195 35.424,45.284 35.361,45.361 35.284,45.424 35.195,45.472 35.1,45.501 35,45.51 0.51,45.51 0.51,99.49 159.49,99.49
12V/48V on Internal Plane 3 (*.GP3) (split plane): 123.29,53.883 123.29,23.522 110.263,23.522 110.338,53.92
-15V on Internal Plane 3 (*.GP3) (split plane): 99.909,19.876 99.916,19.872 99.923,19.867 99.934,19.862 99.944,19.857 99.952,19.855 99.96,19.852 99.972,19.85 99.983,19.847 99.992,19.847 100,19.846 113.846,19.846 113.846,15.154 92.053,15.154 78.154,26.075 78.154,30.846 84.95,30.846
+15V on Internal Plane 3 (*.GP3) (split plane): 113.846,3.154 77.154,3.154 77.154,10.846 113.846,10.846
-9V on Internal Plane 3 (*.GP3) (split plane): 86.846,33.154 74,33.154 73.96,33.148 73.923,33.133 73.891,33.109 73.867,33.077 73.852,33.04 73.846,33 73.846,3.154 67.154,3.154 67.154,54.304 86.846,54.304
+5V on Internal Plane 3 (*.GP3) (split plane): 74.846,75.154 55.154,75.154 55.154,78 55.272,94.487 55.272,94.488 55.272,96.418 74.846,96.418
+7.5/+9V on Internal Plane 3 (*.GP3) (split plane): 39.846,76.862 17.154,76.862 17.154,95 17.148,95.04 17.133,95.077 17.129,95.082 17.129,96.849 39.846,96.849
GND on Internal Plane 3 (*.GP3) (split plane): 159.49,91.01 154.4,91.01 154.3,91.001 154.205,90.972 154.116,90.924 154.039,90.861 153.976,90.784 153.928,90.695 153.899,90.6 153.89,90.5 153.89,22.5 153.899,22.4 153.928,22.305 153.976,22.216 154.039,22.139 154.116,22.076 154.205,22.028 154.3,21.999 154.4,21.99 159.49,21.99 159.49,0.51 35.51,0.51 35.51,45 35.501,45.1 35.472,45.195 35.424,45.284 35.361,45.361 35.284,45.424 35.195,45.472 35.1,45.501 35,45.51 0.51,45.51 0.51,99.49 159.49,99.49
+20V on Internal Plane 3 (*.GP3) (split plane): 64.21,28.154 39.651,28.154 39.651,44.846 64.21,44.846

## Keep-outs
Keep-Out Layer:
  lines w0.203: 2.245,8.103 2.245,91.923 6.69,91.923 6.69,97.003 154.797,97.003 154.797,91.923 158.607,91.923 158.607,8.103 154.797,8.103 154.797,3.023 6.69,3.023 6.69,8.103 2.245,8.103

## Other copper
Top Layer (*GTL):
  text "*.GTL - TOP LAYER GERBER DATA" at 52.178,-33.071 h2.03
Bottom Layer (*GBL):
  text "175-00035 Rev 1" at 113.944,68.129 h1.02
  text "Flexible Power Supply" at 113.665,65.875 h1.02
  text "c  2011, LCOGT" at 113.381,63 h1.02
  text "*.GBL - BOTTOM LAYER GERBER DATA" at 52.178,-33.071 h2.03
Internal Plane 1 (*GP1) (plane layer: these items are gaps in the copper):
  lines w0.305: 154.4,22.5 154.4,21.804 120,21.804 120,68 154.4,68
  text "*.GP1 - INTERNAL PLANE LAYER 1 GERBER DATA" at 52.178,-33.071 h2.03
Internal Plane 2 (*GP2) (plane layer: these items are gaps in the copper):
  text "*.GP2 - INTERNAL PLANE LAYER 2 GERBER DATA" at 52.178,-33.071 h2.03
Internal Plane 3 (*.GP3) (plane layer: these items are gaps in the copper):
  lines w0.254: 17,95 17,97.003
  lines w0.305: 17,95 17,76.708 40,76.708 40,97.003 17,97.003 ; 39.497,28 64.364,28 64.364,45 39.497,45 39.497,28 ; 55,75 55,78 55.118,94.488 55.118,96.572 75,96.572 75,75 55,75 ; 67,3 67,54.458 87,54.458 87,33 74.364,33 74,33 74,3 67,3 ; 77,3 77,11 114,11 114,3 77,3 ; 78,26 92,15 114,15 114,20 100,20 85,31 78,31 78,26 ; 110.109,23.368 110.184,54.074 123.444,54.036 123.444,23.368 110.109,23.368
  text "*.GP3- INTERNAL PLANE LAYER 3 GERBER DATA" at 52.178,-33.071 h2.03

## Silkscreen, mask and mechanical layers (free items; w line width, h text height)
Top Overlay:
  circle w0.254: c157.195,5.563 r2.857
  circle w0.254: c157.195,94.463 r2.857
  rectangle: 136.322,6.426 141.148,9.56
  rectangle: 147.777,6.375 152.603,9.509
  lines w0.508: 45.339,20.916 45.339,30.124 49,30.124
  text "GND" at 137.541,91.44 h1.02
  text "GND" at 79.375,87.198 h1.27
  text "GND" at 137.922,86.995 h1.02
  text "+24V" at 137.414,83.185 h1.02
  text "+24V" at 137.668,79.248 h1.02
  text "GND" at 33.782,55.194 h1.27
  text "1Hz GPS" at 129.306,34 h1.02
  text "GND" at 145,21 h1.02
  text "GND" at 38.608,19.71 h1.27
  text "+24V" at 151.91,17.209 h1.27
  text "PGM" at 138.665,11.865 h1.02
  text "REV:" at 143.815,7.391 h1.02
  text "SCH, 780-00038-" at 121.006,6.756 h1.02
  text "FLEXIBLE PWR SUPPLY" at 121.158,4.496 h1.02
  text "*.GTO - TOP OVERLAY GERBER DATA" at 52.178,-33.071 h2.03
Bottom Overlay:
  text "ADJ" at 22.606,66.269 h1.27
  text "ADJ" at 55.27,64.287 h1.27
  text "ADJ" at 103.81,52.121 h1.27
  text "ADJ" at 111.582,43.713 h1.27
  text "ADJ" at 52.705,38.252 h1.27
  text "ADJ" at 57.302,22.377 h1.27 r270
  text "LINK" at 81.458,21.107 h1.27 r270
  text "LINK" at 93.142,14.58 h1.27
  text "LINK" at 81.737,9.169 h1.27 r270
  text "*GBO - BOTTOM OVERLAY GERBER DATA" at 52.178,-33.071 h2.03
Top Paste:
  text "*.GTP - TOP-SIDE SOLDER PASTE MASK" at 52.178,-33.071 h2.03
Bottom Paste:
  text "*.GBP - BOTTOM-SIDE SOLDER PASTE MASK" at 52.178,-33.071 h2.03
Top Solder:
  text "*.GTS - TOP SOLDER MASK GERBER DATA" at 52.178,-33.071 h2.03
Bottom Solder:
  region: 115.976,61.697 115.976,70 89.865,70 89.865,61.697
  text "*.GBS - BOTTOM SOLDER MASK GERBER DATA" at 52.178,-33.071 h2.03
Mechanical 1:
  the board outline again, w1
Mechanical 2:
  lines w0.254: -296.393,-214.503 -296.393,191.897 237.007,191.897 237.007,-214.503 -296.393,-214.503 ; 134.01,-211.811 ccw(c135.28,-211.811) 135.28,-213.081 143.662,-213.081 ccw(c143.662,-212.065) 144.678,-212.065 144.678,-207.747 ccw(c143.662,-207.747) 143.662,-206.731 134.01,-206.731 134.01,-211.811 ; 134.01,-204.445 ccw(c135.28,-204.445) 135.28,-205.715 234.34,-205.715 ccw(c234.34,-204.445) 235.61,-204.445 235.61,-199.619 ccw(c234.34,-199.619) 234.34,-198.349 134.01,-198.349 134.01,-204.445 ; 134.01,-196.063 ccw(c135.28,-196.063) 135.28,-197.333 183.032,-197.333 ccw(c183.032,-196.063) 184.302,-196.063 184.302,-192.253 ccw(c183.032,-192.253) 183.032,-190.983 134.01,-190.983 134.01,-196.063 ; 134.01,-188.951 ccw(c135.026,-188.951) 135.026,-189.967 155.6,-189.967 ccw(c155.6,-188.697) 156.87,-188.697 156.87,-184.887 ccw(c155.6,-184.887) 155.6,-183.617 134.01,-183.617 134.01,-188.951 ; 145.694,-212.065 ccw(c146.71,-212.065) 146.71,-213.081 196.494,-213.081 ccw(c196.494,-212.065) 197.51,-212.065 197.51,-207.747 ccw(c196.494,-207.747) 196.494,-206.731 145.694,-206.731 145.694,-212.065 ; 157.886,-188.697 ccw(c159.156,-188.697) 159.156,-189.967 183.032,-189.967 ccw(c183.032,-188.697) 184.302,-188.697 184.302,-184.887 ccw(c183.032,-184.887) 183.032,-183.617 157.886,-183.617 157.886,-188.697 ; 185.318,-196.063 ccw(c186.588,-196.063) 186.588,-197.333 234.34,-197.333 ccw(c234.34,-196.063) 235.61,-196.063 235.61,-192.253 ccw(c234.34,-192.253) 234.34,-190.983 185.318,-190.983 185.318,-196.063 ; 185.318,-188.697 ccw(c186.588,-188.697) 186.588,-189.967 210.464,-189.967 ccw(c210.464,-188.697) 211.734,-188.697 211.734,-184.887 ccw(c210.464,-184.887) 210.464,-183.617 185.318,-183.617 185.318,-188.697 ; 198.526,-211.811 ccw(c199.796,-211.811) 199.796,-213.081 208.178,-213.081 ccw(c208.178,-212.065) 209.194,-212.065 209.194,-207.747 ccw(c208.178,-207.747) 208.178,-206.731 198.526,-206.731 198.526,-211.811 ; 210.21,-212.065 ccw(c211.226,-212.065) 211.226,-213.081 234.34,-213.081 ccw(c234.34,-211.811) 235.61,-211.811 235.61,-208.001 ccw(c234.34,-208.001) 234.34,-206.731 210.21,-206.731 210.21,-212.065 ; 212.75,-188.697 ccw(c214.02,-188.697) 214.02,-189.967 234.34,-189.967 ccw(c234.34,-188.697) 235.61,-188.697 235.61,-184.887 ccw(c234.34,-184.887) 234.34,-183.617 212.75,-183.617 212.75,-188.697
  lines w0.457: -258.476,-105.771 -135.524,-105.771 ; -258.476,-97.4 -135.524,-97.4 ; -260,-163.308 ccw(c-257.308,-163.308) -257.308,-166 -136.692,-166 ccw(c-136.692,-163.308) -134,-163.308 -134,-84.692 ccw(c-136.692,-84.692) -136.692,-82 -257.308,-82 ccw(c-257.308,-84.692) -260,-84.692 -260,-163.308
  lines w0.508: -295.883,-198.098 cw(c-294.615,-200) -294.615,-197.714 ; -294.615,-198.73 ccw(c-294.615,-200) -295.885,-200 -295.885,-212.446 ccw(c-294.615,-212.446) -294.615,-213.716 -213.335,-213.716 ccw(c-213.335,-212.446) -212.065,-212.446 -212.065,-203.81 ccw(c-213.335,-203.81) -213.335,-202.54 -280.391,-202.54 ; -211.433,-213.714 ccw(c-213.335,-212.446) -211.049,-212.446 -211.049,-203.81 ; 132.897,-214.096 cw(c135.28,-211.811) 131.978,-211.811 131.978,-169.393 cw(c135.28,-169.393) 135.28,-166.091 234.34,-166.091 cw(c234.34,-169.393) 236.592,-166.978 ; -105.131,-209.931 ccw(c-101.829,-209.931) -101.829,-213.233 18.567,-213.233 ccw(c18.567,-209.931) 21.869,-209.931 21.869,-169.545 ccw(c18.567,-169.545) 18.567,-166.243 -101.829,-166.243 ccw(c-101.829,-169.545) -105.131,-169.545 -105.131,-209.931 ; 132.994,-211.811 ccw(c135.28,-211.811) 135.28,-214.097 234.34,-214.097 ccw(c234.34,-211.811) 236.626,-211.811 236.626,-169.393 ccw(c234.34,-169.393) 234.34,-167.107 135.28,-167.107 ccw(c135.28,-169.393) 132.994,-169.393 132.994,-211.811
  lines w0.61: -40.361,-209.169 -36.551,-209.169 ; -40.361,-202.819 -36.551,-202.819 ; -40.361,-196.469 -36.551,-196.469 ; -40.361,-190.119 -36.551,-190.119 ; -40.361,-183.769 -36.551,-183.769
  lines w0.762: -309.093,-227.203 -309.093,204.597 249.707,204.597 249.707,-227.203 -309.093,-227.203
  lines w1.27: 137.693,-179.832 179.603,-179.832 ; 137.693,-170.18 179.603,-170.18 ; 179.603,-179.832 179.603,-170.18 ; 179.603,-179.832 137.439,-179.832 137.439,-170.18 179.603,-170.18
  text "NOTES (UNLESS OTHERWISE SPECIFIED):" at -288.265,178.587 h2.29
  text "GENERAL" at -285.725,173.507 h2.29
  text "1)" at -283.185,168.426 h1.91
  text "PCB IS 5-LAYER, .062\" THICK." at -278.105,168.427 h1.91
  text "2)" at -283.185,164.616 h1.91
  text "CONSTRUCTION IS SOLDER-MASK-OVER-BARE-COPPER (SMOBC)." at -278.105,164.616 h1.91
  text "3)" at -283.185,160.806 h1.91
  text "ACCEPTABILITY SHALL BE BASED ON IPC-A-600, CLASS 2." at -278.105,160.806 h1.91
  text "4)" at -283.185,156.996 h1.91
  text "THE FOLLOWING GERBER RS274X PHOTO TOOL FILES SHALL BE USED TO DEFINE ALL CIRCUIT FEATURES:" at -278.105,156.996 h1.91
  text "*.GTL - TOP LAYER GERBER DATA" at -271.145,151.638 h2.03
  text "*.GP1 - INTERNAL PLANE LAYER 1 GERBER DATA" at -271.145,136.026 h2.03
  text "*.GP2 - INTERNAL PLANE LAYER 2 GERBER DATA" at -271.145,132.122 h2.03
  text "*.GP3- INTERNAL PLANE LAYER 3 GERBER DATA" at -271.145,128.219 h2.03
  text "*.GBL - BOTTOM LAYER GERBER DATA" at -271.145,116.51 h2.03
  text "*.GTO - TOP OVERLAY GERBER DATA" at -271.145,112.607 h2.03
  text "*.GTS - TOP SOLDER MASK GERBER DATA" at -271.145,108.704 h2.03
  text "*.GTP - TOP-SIDE SOLDER PASTE MASK" at -271.145,104.8 h2.03
  text "*GBO - BOTTOM OVERLAY GERBER DATA" at -271.145,100.897 h2.03
  text "*.GBS - BOTTOM SOLDER MASK GERBER DATA" at -271.145,96.994 h2.03
  text "*.GBP - BOTTOM-SIDE SOLDER PASTE MASK" at -271.145,93.091 h2.03
  text "5)" at -285.648,74.911 h1.91
  text "THE PHOTO TOOL SHALL NOT BE COMPENSATED WITHOUT PRIOR ENGINEERING APPROVAL." at -280.568,74.911 h1.91
  text "PCB DESIGNER: RICH LOBDILL   PH (805) 880-1621  FAX (805) 961-1792." at -280.568,71.102 h1.91
  text "FABRICATION TOLERANCES" at -284.251,62.814 h2.29
  text "6)" at -281.711,57.733 h1.91
  text "END PRODUCT CONDUCTOR WIDTHS AND PAD DIAMETERS SHALL NOT VARY MORE THAN" at -276.631,57.733 h1.91
  text "0.002\" FROM THE 1:1 DIMENSIONS OF THE MASTER ARTWORK." at -276.631,53.924 h1.91
  text "7)" at -281.711,50.113 h1.91
  text "THE CONDUCTIVE PATTERN SHALL BE POSITIONED SO THAT THE LOCATION OF ANY PAD OR" at -276.631,50.113 h1.91
  text "LAND SHALL BE WITHIN 0.005\" DIAMETER TO THE TRUE POSITION OF THE HOLE IT CIRCUMSCRIBES." at -276.631,46.304 h1.91
  text "8)" at -281.711,42.493 h1.91
  text "ALL DRILL HOLE SIZES AND TOLERANCES APPLY AFTER PLATING." at -276.631,42.493 h1.91
  text "9)" at -281.711,38.683 h1.91
  text "THE MINIMUM ANNULAR RING SHALL BE 0.005\"." at -276.631,38.683 h1.91
  text "10)" at -283.108,34.873 h1.91
  text "BOW AND TWIST SHALL NOT EXCEED 0.010\" PER INCH." at -276.631,34.873 h1.91
  text "11)" at -282.854,31.063 h1.91
  text "FOR PCB ROUTING DIMENSIONS: .XXX = +/-.005\"  .XX = +/-.020\"" at -276.631,31.063 h1.91
  text "MATERIAL" at -284.251,25.984 h2.29
  text "12)" at -283.108,20.903 h1.91
  text "BASE MATERIAL IS FR4 EPOXY FIBERGLASS" at -276.454,20.752 h1.91
  text "SEE STACK-UP LEGEND FOR COPPER CLADDING CALL OUTS" at -276.454,17.196 h1.91
  text "13)" at -283.108,17.093 h1.91
  text "PLATING" at -284.251,12.014 h2.29
  text "14)" at -283.108,7.06 h1.91
  text "ALL HOLES AND CONDUCTIVE SURFACES SHALL BE PLATED WITH A MINIMUM OF 0.001\" COPPER." at -276.631,7.06 h1.91
  text "15)" at -283.108,3.25 h1.91
  text "AFTER SOLDERMASK, ALL EXPOSED HOLES AND CONDUCTIVE SURFACES SHALL BE COATED" at -276.631,3.25 h1.91
  text "WITH A GOLD IMMERSION PLATING TO PRESERVE SOLDERABILITY." at -276.454,-0.584 h1.91
  text "COATINGS" at -284.251,-5.639 h2.29
  text "16)" at -282.981,-10.593 h1.91
  text "THE SOLDERMASK SHALL BE BLACK LIQUID PHOTO-IMAGEABLE PER IPC-SM-840, TYPE-B, CLASS 2." at -276.631,-10.593 h1.91
  text "17)" at -283.108,-14.403 h1.91
  text "THE SOLDERMASK REGISTRATION ALLOWANCE IS 0.003\".  THERE SHALL BE NO SOLDERMASK ON" at -276.631,-14.403 h1.91
  text "ANY SOLDER PAD OR LAND." at -276.631,-18.213 h1.91
  text "MARKING" at -284.251,-23.292 h2.29
  text "18)" at -283.108,-28.246 h1.91
  text "THE LEGEND SHALL BE SCREEN-PRINTED USING PERMANENT YELLOW EPOXY INK." at -276.631,-28.246 h1.91
  text "19)" at -283.108,-32.056 h1.91
  text "THE SCREEN PRINTING REGISTRATION ALLOWANCE IS 0.007\".  THERE SHALL BE NO INK ON ANY" at -276.631,-32.056 h1.91
  text "SOLDER PAD OR LAND." at -276.631,-35.865 h1.91
  text "20)" at -283.362,-39.676 h1.91
  text "THE VENDOR CODE AND UL FLAMMABILITY RATING MAY BE ETCHED IN THE FOIL OR MARKED IN" at -276.631,-39.676 h1.91
  text "PERMANENT EPOXY INK (VENDOR'S OPTION)." at -276.631,-43.485 h1.91
  text "ELECTRICAL TESTING" at -284.251,-48.565 h2.29
  text "21)" at -283.108,-53.519 h1.91
  text "ALL BOARDS SHALL BE ELECTRICALLY TESTED TO THE SUPPLIED IPC-D-356A NET LIST" at -276.631,-53.519 h1.91
  text "FOR CONTINUITY, OPENS AND SHORTS." at -276.631,-57.328 h1.91
  text "Layer Stack Up Detail for: 175-00035 rev1, Flex Pwr Sply.PcbDoc" at -258.476,-91.015 h1.93
  text "Layer" at -258.476,-100.524 h1.93
  text "COPPER THICKNESS" at -192,-103 h2.54
  text "Name" at -258.476,-104.385 h1.93
  text "Top Layer (*GTL)" at -258.476,-111.492 h2.69
  text "3 oz" at -178.342,-112.01 h2.54
  text "3 oz" at -178.342,-122.01 h2.54
  text "Internal Plane 1 (*GP1)" at -258.476,-122.476 h2.69
  text "3 oz" at -179.342,-133.01 h2.54
  text "Internal Plane 2 (*GP2)" at -258.476,-133.46 h2.69
  text "NOTE: COPPER THICKNESS: 3 oz ALL LAYERS" at -121,-142 h3.81
  text "3 oz" at -179.342,-144.01 h2.54
  text "Internal Plane 3 (*.GP3)" at -258.476,-144.444 h2.69
  text "Bottom Layer (*GBL)" at -258.476,-155.428 h2.69
  text "3 oz" at -179.342,-156.01 h2.54
  text "Las Cumbres Observatory, Inc." at 183.921,-170.688 h2.29
  text "Las Cumbres Observatory" at 138.963,-173.736 h3.81
  text "PRIMARY PCB SPECIFICATIONS" at -93.777,-174.117 h5.08
  text "6740 Cortona Dr." at 195.097,-174.6 h2.29
  text "Global Telescope Network" at 143.027,-177.8 h3.17
  text "Goleta, CA 93117" at 193.827,-178.41 h2.29
  text "(REFER TO COMPLETE SPEC LISTING AT LEFT FOR FURTHER DETAILS)" at -102.591,-179.324 h2.54
  text "www.lcogt.net" at 197.383,-182.118 h2.29
  text "DATE" at 134.518,-184.932 h0.81
  text "DESIGNED" at 158.394,-184.932 h0.81
  text "DRAWN" at 185.826,-184.932 h0.81
  text "SCALE" at 213.258,-184.932 h0.81
  text "NUMBER OF LAYERS" at -100.051,-185.674 h3.81
  text "5" at -9.881,-185.674 h3.81
  text "Rich Lobdill" at 193.573,-187.452 h1.4
  text "Rich Lobdill" at 164.998,-187.579 h1.4
  text "1 : 1" at 220.497,-187.935 h2.29
  text "10/1/2011" at 135.28,-188.112 h2.29
  text "FINISHED THICKNESS" at -100.051,-192.024 h3.81
  text ".062\"" at -14.326,-192.024 h3.81
  text "CHECKED/DATE" at 134.518,-192.298 h0.81
  text "APPROVED/DATE" at 185.826,-192.298 h0.81
  text "BASE MATERIAL" at -100.051,-198.374 h3.81
  text "FR4" at -16.231,-198.374 h3.81
  text "TITLE" at 134.518,-199.664 h0.81
  text "175-00035, FLEX POWER SUPPLY" at 140.106,-203.327 h2.54
  text "GOLD IMMERSION" at -28.778,-203.886 h3.81
  text "PLATING TYPE" at -100.051,-204.724 h3.81
  text "THIS DRAWING EMBODIES A PROPRIETARY DESIGN OWNED BY LAS CUMBRES" at -293.599,-205.334 h1.52
  text "OBSERVATORY.  IT IS SUBMITTED FOR A SPECIFIC PURPOSE UNDER A CON-" at -293.599,-207.874 h1.52
  text "SIZE" at 134.518,-208.046 h0.81
  text "DOC NO." at 146.202,-208.046 h0.81
  text "REV" at 199.034,-208.046 h0.81
  text "SHEET" at 210.718,-208.046 h0.81
  text "FIDENTIAL RELATIONSHIP, AND EXCEPT FOR PURPOSES EXPRESSLY GRANTED" at -293.599,-210.287 h1.52
  text "OF" at 221.64,-210.668 h1.52
  text "SOLDER MASK COLOR" at -100.051,-211.074 h3.81
  text "BLACK" at -13.056,-211.074 h3.81
  text "1" at 217.322,-211.176 h2.54
  text "X" at 227.482,-211.176 h2.54
  text "1" at 202.717,-211.506 h3.3
  text "-" at 160.299,-211.557 h3.3
  text "GPT" at 178.58,-211.932 h3.3
  text "C" at 137.947,-211.963 h2.54
  text "IN WRITING, ALL RIGHTS ARE RESERVED BY LAS CUMBRES OBSERVATORY." at -293.599,-212.573 h1.52
Mechanical 3:
  lines w0.127: 120,0 160,0
Mechanical 5:
  text "FOR REV2: FIX FOOTPRINT OF AD SUPPLY, PIN7 OFF GRID" at 33,122 h1.27
  text "FOR REV2: FIX FOOTPRINT FOR VICOR, ALIGNMENT PINS BOTH CONNECTORS" at 32.797,119 h1.27
  text "175-00035 REV 1, FLEX PWR SUPPLY" at 52.292,-22.49 h2.03
  text "LAS CUMBRES OBSERVATORY     10/1/2011" at 52.292,-26.3 h2.03
Drill Drawing:
  lines w0.254: -296.393,-214.503 -296.393,191.897 237.007,191.897 237.007,-214.503 -296.393,-214.503 ; 134.01,-211.811 ccw(c135.28,-211.811) 135.28,-213.081 143.662,-213.081 ccw(c143.662,-212.065) 144.678,-212.065 144.678,-207.747 ccw(c143.662,-207.747) 143.662,-206.731 134.01,-206.731 134.01,-211.811 ; 134.01,-204.445 ccw(c135.28,-204.445) 135.28,-205.715 234.34,-205.715 ccw(c234.34,-204.445) 235.61,-204.445 235.61,-199.619 ccw(c234.34,-199.619) 234.34,-198.349 134.01,-198.349 134.01,-204.445 ; 134.01,-196.317 ccw(c135.026,-196.317) 135.026,-197.333 171.094,-197.333 ccw(c171.094,-196.063) 172.364,-196.063 172.364,-192.253 ccw(c171.094,-192.253) 171.094,-190.983 134.01,-190.983 134.01,-196.317 ; 145.694,-212.065 ccw(c146.71,-212.065) 146.71,-213.081 196.494,-213.081 ccw(c196.494,-212.065) 197.51,-212.065 197.51,-207.747 ccw(c196.494,-207.747) 196.494,-206.731 145.694,-206.731 145.694,-212.065 ; 173.38,-196.063 ccw(c174.65,-196.063) 174.65,-197.333 210.464,-197.333 ccw(c210.464,-196.063) 211.734,-196.063 211.734,-192.253 ccw(c210.464,-192.253) 210.464,-190.983 173.38,-190.983 173.38,-196.063 ; 198.526,-211.811 ccw(c199.796,-211.811) 199.796,-213.081 208.178,-213.081 ccw(c208.178,-212.065) 209.194,-212.065 209.194,-207.747 ccw(c208.178,-207.747) 208.178,-206.731 198.526,-206.731 198.526,-211.811 ; 210.21,-212.065 ccw(c211.226,-212.065) 211.226,-213.081 234.34,-213.081 ccw(c234.34,-211.811) 235.61,-211.811 235.61,-208.001 ccw(c234.34,-208.001) 234.34,-206.731 210.21,-206.731 210.21,-212.065 ; 212.75,-196.063 ccw(c214.02,-196.063) 214.02,-197.333 234.34,-197.333 ccw(c234.34,-196.063) 235.61,-196.063 235.61,-192.253 ccw(c234.34,-192.253) 234.34,-190.983 212.75,-190.983 212.75,-196.063
  lines w0.508: -295.756,-198.479 cw(c-294.488,-200.381) -294.488,-198.095 ; -294.488,-199.111 ccw(c-294.488,-200.381) -295.758,-200.381 -295.758,-212.827 ccw(c-294.488,-212.827) -294.488,-214.097 -213.208,-214.097 ccw(c-213.208,-212.827) -211.938,-212.827 -211.938,-204.191 ccw(c-213.208,-204.191) -213.208,-202.921 -280.264,-202.921 ; -211.306,-214.095 ccw(c-213.208,-212.827) -210.922,-212.827 -210.922,-204.191 ; 132.865,-214.063 cw(c135.28,-211.811) 131.978,-211.811 131.978,-190.983 cw(c134.01,-190.983) 134.01,-188.951 234.34,-188.951 cw(c234.34,-192.253) 236.592,-189.838 ; 132.994,-211.811 ccw(c135.28,-211.811) 135.28,-214.097 234.34,-214.097 ccw(c234.34,-211.811) 236.626,-211.811 236.626,-192.253 ccw(c234.34,-192.253) 234.34,-189.967 134.01,-189.967 ccw(c134.01,-190.983) 132.994,-190.983 132.994,-211.811
  lines w0.762: -309.093,-227.203 -309.093,204.597 249.707,204.597 249.707,-227.203 -309.093,-227.203
  text ".Legend" at -30.353,-109.931 h2.54
  text "DESIGNED" at 134.518,-192.298 h0.81
  text "DRAWN" at 173.888,-192.298 h0.81
  text "SCALE" at 213.258,-192.298 h0.81
  text "Rich Lobdill" at 146.863,-194.742 h1.4
  text "Rich Lobdill" at 186.512,-194.793 h1.4
  text "1 : 1" at 220.497,-195.301 h2.29
  text "TITLE" at 134.518,-199.664 h0.81
  text "175-00035, FLEX POWER SUPPLY" at 140.03,-203.327 h2.54
  text "THIS DRAWING EMBODIES A PROPRIETARY DESIGN OWNED BY LAS CUMBRES" at -293.472,-205.715 h1.52
  text "SIZE" at 134.518,-208.046 h0.81
  text "DOC NO." at 146.202,-208.046 h0.81
  text "REV" at 199.034,-208.046 h0.81
  text "SHEET" at 210.718,-208.046 h0.81
  text "OBSERVATORY.  IT IS SUBMITTED FOR A SPECIFIC PURPOSE UNDER A CON-" at -293.472,-208.255 h1.52
  text "FIDENTIAL RELATIONSHIP, AND EXCEPT FOR PURPOSES EXPRESSLY GRANTED" at -293.472,-210.668 h1.52
  text "OF" at 221.64,-210.668 h1.52
  text "2" at 216.941,-211.176 h2.54
  text "X" at 227.482,-211.176 h2.54
  text "-" at 160.299,-211.557 h3.3
  text "1" at 202.59,-211.557 h3.3
  text "C" at 137.947,-211.963 h3.05
  text "GD1" at 181.127,-211.963 h3.05
  text "IN WRITING, ALL RIGHTS ARE RESERVED BY LAS CUMBRES OBSERVATORY." at -293.472,-212.954 h1.52

## Dimensions
0,0 to 0,100 on Mechanical 2
0,0 to 160,0 on Mechanical 2
0,45 to 35,0 on Mechanical 2
35,0 to 0,45 on Mechanical 2

## Text inside footprints (layer, text, board x,y; h text height)
P1: Top Overlay "1" at 151.088,47.079 h1.02; Top Overlay "PCB EDGE" at 156.93,43.65 h1.27 r90; Top Overlay "13" at 138.261,35.014 h1.02; Top Overlay "16" at 138.261,64.097 h1.02; Top Overlay "4" at 139.023,46.952 h1.02; Top Overlay "12" at 138.515,51.905 h1.02; Top Overlay "14" at 138.007,41.364 h1.02; Top Overlay "15" at 138.388,57.747 h1.02
PS1: Top Overlay "1" at 123.444,91.951 h1.78
U1: Top Overlay "Pin socket Keystone 1417" at 57.715,41.065 h1.52 r270
U3: Top Overlay "Pin socket Keystone 1417" at 20.285,49.672 h1.52 r90
U4: Top Overlay "Pin socket Keystone 1417" at 57.335,49.632 h1.52 r90